# Altium PCB PCB1.PcbDoc
Units mm, origin at the board's own origin, x right, y up, seen from the top; angles counter-clockwise.
Board outline 80 x 70 mm, 2 copper layers (Top Layer, Bottom Layer); 102 components, 101 nets, 202 pads, 0 vias.
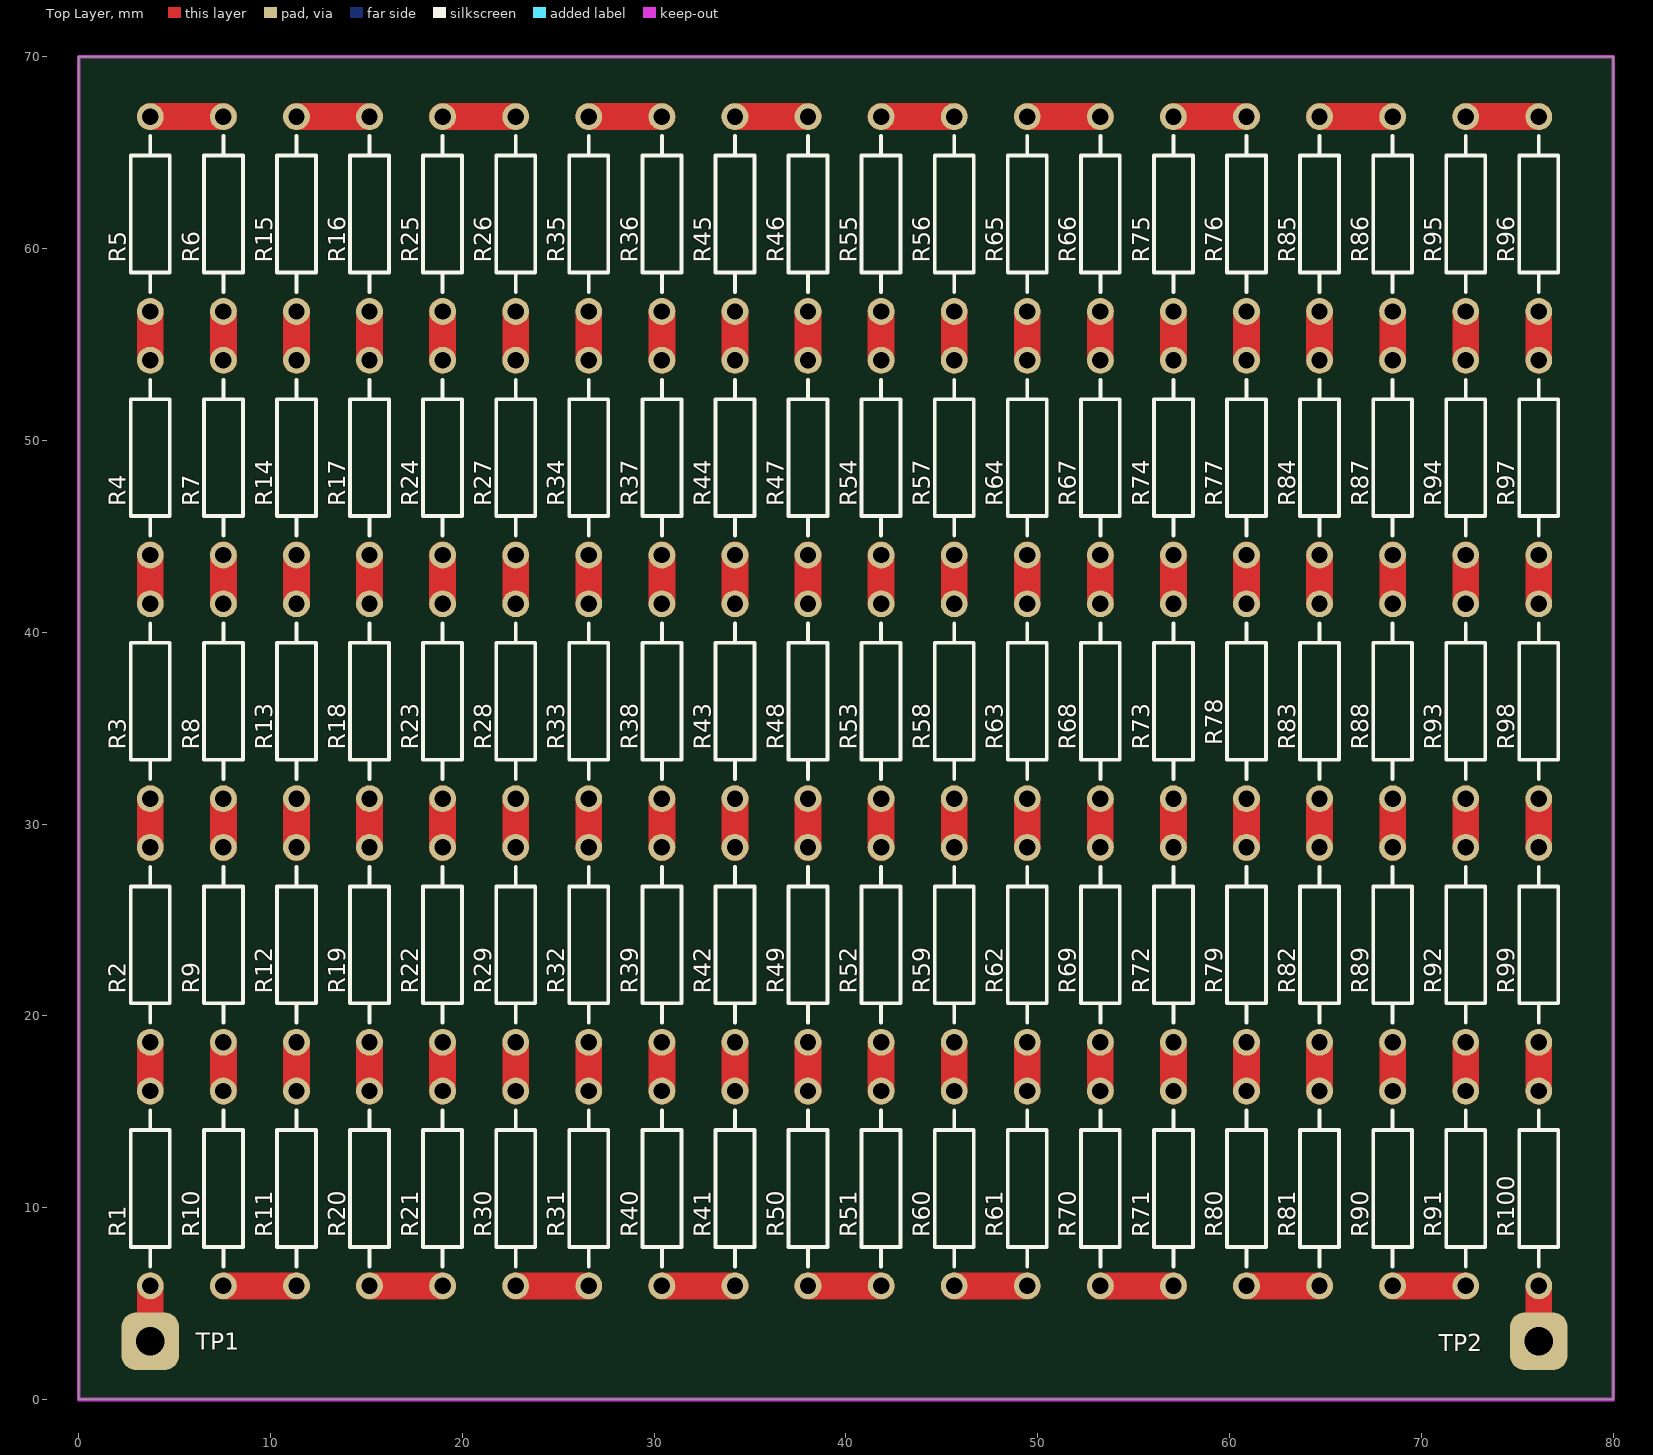
[diagram p0: Top Layer view]
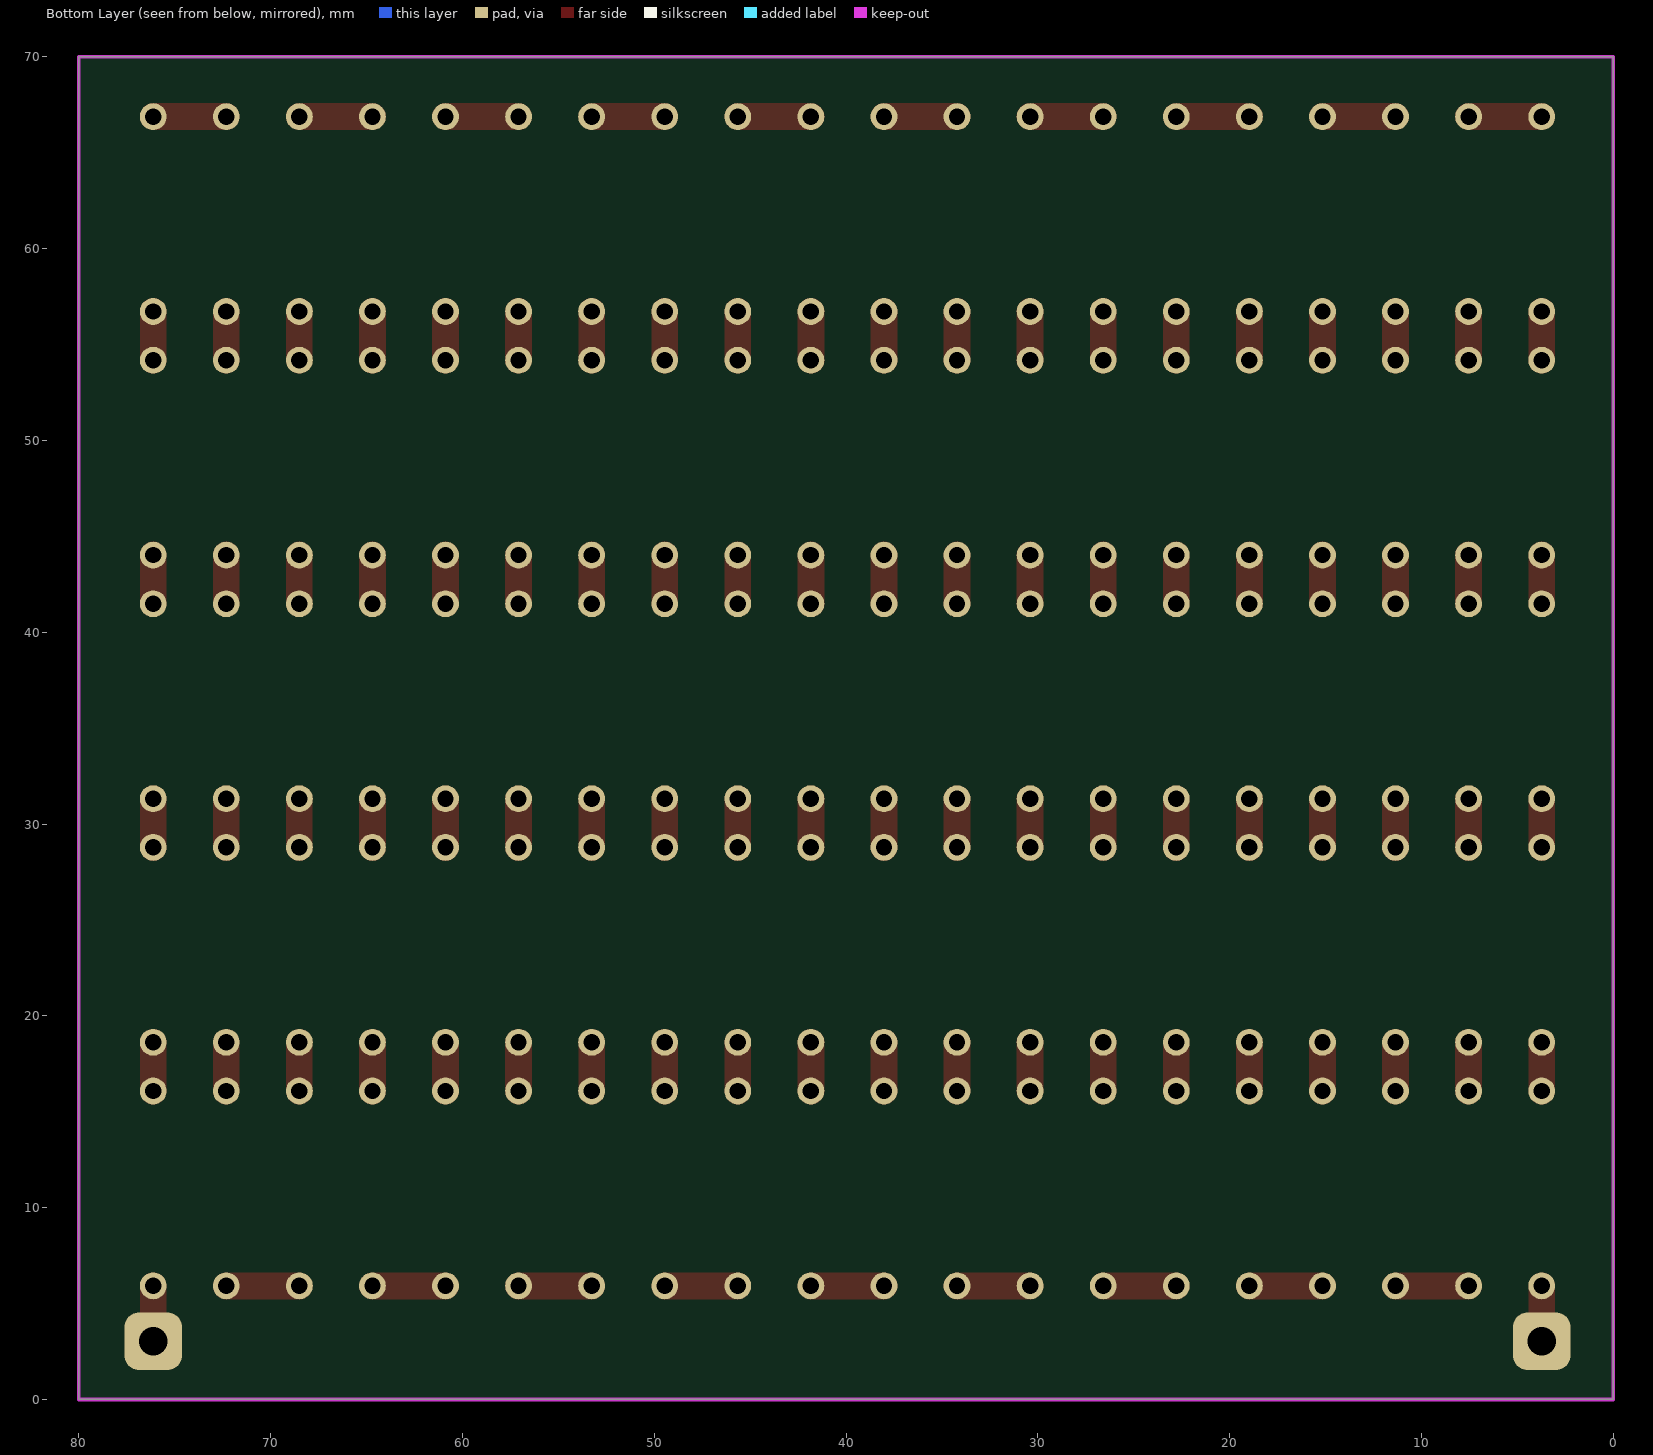
[diagram p1: Bottom Layer view, seen from below]

## Layer stack, top to bottom
Top Layer: signal copper 0.0356
Dielectric: dielectric 0.32, FR-4, Dk 4.8
Bottom Layer: signal copper 0.0356

## Board outline
0,0 80,0 80,70 0,70

## Design rules (kind name [scope] priority, off if disabled: settings)
Clearance [All] p1: gap=0.254
PolygonConnect [All] p1: connectstyle=Relief reliefconductorwidth=0.254 reliefentries=4 polygonreliefangle="90 Angle"
RoutingVias [All] p1: holewidth=0.711 width=1.27 viastyle="Through Hole" minholewidth=0.711 minwidth=1.27 maxholewidth=0.711 maxwidth=1.27
SilkToSilkClearance [All] p1: silktosilkclearance=0
SilkscreenOverComponentPads [All] p1: minsilkscreentomaskgap=0
SolderMaskExpansion [All] p1: expansion=0.102
Width [All] p1: maxlimit=1.397 minlimit=0.254 preferedwidth=1.397
26 further rules are at their usual default settings.

## Components (designator, comment, footprint, x,y, rotation, side; value= is the part's Value field where it differs from the comment)
R1 "49.99K" AXIAL-0.4 3.73,11 r270 top
R2 "49.99K" AXIAL-0.4 3.73,23.7 r270 top
R3 "49.99K" AXIAL-0.4 3.73,36.4 r270 top
R4 "49.99K" AXIAL-0.4 3.73,49.1 r270 top
R5 "49.99K" AXIAL-0.4 3.73,61.8 r270 top
R6 "49.99K" AXIAL-0.4 7.54,61.8 r90 top
R7 "49.99K" AXIAL-0.4 7.54,49.1 r90 top
R8 "49.99K" AXIAL-0.4 7.54,36.4 r90 top
R9 "49.99K" AXIAL-0.4 7.54,23.7 r90 top
R10 "49.99K" AXIAL-0.4 7.54,11 r90 top
R11 "49.99K" AXIAL-0.4 11.35,11 r270 top
R12 "49.99K" AXIAL-0.4 11.35,23.7 r270 top
R13 "49.99K" AXIAL-0.4 11.35,36.4 r270 top
R14 "49.99K" AXIAL-0.4 11.35,49.1 r270 top
R15 "49.99K" AXIAL-0.4 11.35,61.8 r270 top
R16 "49.99K" AXIAL-0.4 15.16,61.8 r90 top
R17 "49.99K" AXIAL-0.4 15.16,49.1 r90 top
R18 "49.99K" AXIAL-0.4 15.16,36.4 r90 top
R19 "49.99K" AXIAL-0.4 15.16,23.7 r90 top
R20 "49.99K" AXIAL-0.4 15.16,11 r90 top
R21 "49.99K" AXIAL-0.4 18.97,11 r270 top
R22 "49.99K" AXIAL-0.4 18.97,23.7 r270 top
R23 "49.99K" AXIAL-0.4 18.97,36.4 r270 top
R24 "49.99K" AXIAL-0.4 18.97,49.1 r270 top
R25 "49.99K" AXIAL-0.4 18.97,61.8 r270 top
R26 "49.99K" AXIAL-0.4 22.78,61.8 r90 top
R27 "49.99K" AXIAL-0.4 22.78,49.1 r90 top
R28 "49.99K" AXIAL-0.4 22.78,36.4 r90 top
R29 "49.99K" AXIAL-0.4 22.78,23.7 r90 top
R30 "49.99K" AXIAL-0.4 22.78,11 r90 top
R31 "49.99K" AXIAL-0.4 26.59,11 r270 top
R32 "49.99K" AXIAL-0.4 26.59,23.7 r270 top
R33 "49.99K" AXIAL-0.4 26.59,36.4 r270 top
R34 "49.99K" AXIAL-0.4 26.59,49.1 r270 top
R35 "49.99K" AXIAL-0.4 26.59,61.8 r270 top
R36 "49.99K" AXIAL-0.4 30.4,61.8 r90 top
R37 "49.99K" AXIAL-0.4 30.4,49.1 r90 top
R38 "49.99K" AXIAL-0.4 30.4,36.4 r90 top
R39 "49.99K" AXIAL-0.4 30.4,23.7 r90 top
R40 "49.99K" AXIAL-0.4 30.4,11 r90 top
R41 "49.99K" AXIAL-0.4 34.21,11 r270 top
R42 "49.99K" AXIAL-0.4 34.21,23.7 r270 top
R43 "49.99K" AXIAL-0.4 34.21,36.4 r270 top
R44 "49.99K" AXIAL-0.4 34.21,49.1 r270 top
R45 "49.99K" AXIAL-0.4 34.21,61.8 r270 top
R46 "49.99K" AXIAL-0.4 38.02,61.8 r90 top
R47 "49.99K" AXIAL-0.4 38.02,49.1 r90 top
R48 "49.99K" AXIAL-0.4 38.02,36.4 r90 top
R49 "49.99K" AXIAL-0.4 38.02,23.7 r90 top
R50 "49.99K" AXIAL-0.4 38.02,11 r90 top
R51 "49.99K" AXIAL-0.4 41.83,11 r270 top
R52 "49.99K" AXIAL-0.4 41.83,23.7 r270 top
R53 "49.99K" AXIAL-0.4 41.83,36.4 r270 top
R54 "49.99K" AXIAL-0.4 41.83,49.1 r270 top
R55 "49.99K" AXIAL-0.4 41.83,61.8 r270 top
R56 "49.99K" AXIAL-0.4 45.64,61.8 r90 top
R57 "49.99K" AXIAL-0.4 45.64,49.1 r90 top
R58 "49.99K" AXIAL-0.4 45.64,36.4 r90 top
R59 "49.99K" AXIAL-0.4 45.64,23.7 r90 top
R60 "49.99K" AXIAL-0.4 45.64,11 r90 top
R61 "49.99K" AXIAL-0.4 49.45,11 r270 top
R62 "49.99K" AXIAL-0.4 49.45,23.7 r270 top
R63 "49.99K" AXIAL-0.4 49.45,36.4 r270 top
R64 "49.99K" AXIAL-0.4 49.45,49.1 r270 top
R65 "49.99K" AXIAL-0.4 49.45,61.8 r270 top
R66 "49.99K" AXIAL-0.4 53.26,61.8 r90 top
R67 "49.99K" AXIAL-0.4 53.26,49.1 r90 top
R68 "49.99K" AXIAL-0.4 53.26,36.4 r90 top
R69 "49.99K" AXIAL-0.4 53.26,23.7 r90 top
R70 "49.99K" AXIAL-0.4 53.26,11 r90 top
R71 "49.99K" AXIAL-0.4 57.07,11 r270 top
R72 "49.99K" AXIAL-0.4 57.07,23.7 r270 top
R73 "49.99K" AXIAL-0.4 57.07,36.4 r270 top
R74 "49.99K" AXIAL-0.4 57.07,49.1 r270 top
R75 "49.99K" AXIAL-0.4 57.07,61.8 r270 top
R76 "49.99K" AXIAL-0.4 60.88,61.8 r90 top
R77 "49.99K" AXIAL-0.4 60.88,49.1 r90 top
R78 "49.99K" AXIAL-0.4 60.88,36.4 r90 top
R79 "49.99K" AXIAL-0.4 60.88,23.7 r90 top
R80 "49.99K" AXIAL-0.4 60.88,11 r90 top
R81 "49.99K" AXIAL-0.4 64.69,11 r270 top
R82 "49.99K" AXIAL-0.4 64.69,23.7 r270 top
R83 "49.99K" AXIAL-0.4 64.69,36.4 r270 top
R84 "49.99K" AXIAL-0.4 64.69,49.1 r270 top
R85 "49.99K" AXIAL-0.4 64.69,61.8 r270 top
R86 "49.99K" AXIAL-0.4 68.5,61.8 r90 top
R87 "49.99K" AXIAL-0.4 68.5,49.1 r90 top
R88 "49.99K" AXIAL-0.4 68.5,36.4 r90 top
R89 "49.99K" AXIAL-0.4 68.5,23.7 r90 top
R90 "49.99K" AXIAL-0.4 68.5,11 r90 top
R91 "49.99K" AXIAL-0.4 72.31,11 r270 top
R92 "49.99K" AXIAL-0.4 72.31,23.7 r270 top
R93 "49.99K" AXIAL-0.4 72.31,36.4 r270 top
R94 "49.99K" AXIAL-0.4 72.31,49.1 r270 top
R95 "49.99K" AXIAL-0.4 72.31,61.8 r270 top
R96 "49.99K" AXIAL-0.4 76.12,61.8 r90 top
R97 "49.99K" AXIAL-0.4 76.12,49.1 r90 top
R98 "49.99K" AXIAL-0.4 76.12,36.4 r90 top
R99 "49.99K" AXIAL-0.4 76.12,23.7 r90 top
R100 "49.99K" AXIAL-0.4 76.12,11 r90 top
TP1 "TP" TP 3.73,3.032 r0 top
TP2 "TP" TP 76.12,3.032 r0 top

## Footprints (in the part's own frame and the unit in brackets; to place one, negate y for a bottom-side part, rotate by r counter-clockwise, add the part's x,y. Pads: shape width x height; smd on the part's side, far side on the other; paste and mask are expansions set on the pad)
AXIAL-0.4 [mm] "Axial Device, Thru-Hole; 2 Leads; 0.4 in Pin Spacing"
  round 1.4 hole 0.85: 1(-5.08,0) 2(5.08,0)
  silkscreen extent -4.06,-1.02 4.06,1.02
TP [mm]
  rrect50% 3x3 hole 1.5: 1(0,0)

## Part data
R1 R2 R3 R4 R5 R6 R7 R8 R9 R10 R11 R12 R13 R14 R15 R16 R17 R18 R19 R20 R21 R22 R23 R24 R25 R26 R27 R28 R29 R30 R31 R32 R33 R34 R35 R36 R37 R38 R39 R40 R41 R42 R43 R44 R45 R46 R47 R48 R49 R50 R51 R52 R53 R54 R55 R56 R57 R58 R59 R60 R61 R62 R63 R64 R65 R66 R67 R68 R69 R70 R71 R72 R73 R74 R75 R76 R77 R78 R79 R80 R81 R82 R83 R84 R85 R86 R87 R88 R89 R90 R91 R92 R93 R94 R95 R96 R97 R98 R99 R100: library part Res2, "Resistor"

## Nets (pads, with @x,y where several pads share a name; then routed paths per layer and width w, separated by ;. In a path a pad name is that pad's centre, name@x,y a point inside that pad or via, vN(x,y) a via of type N, cw(c..) or ccw(c..) an arc to the next point about the centre after c; other vN are vias at no path point)
NetR1_1: R1.1 R2.2 | length 2.5
  Top Layer w1.397: R1.1 R2.2
NetR1_2: R1.2 TP1.1 | length 2.9
  Top Layer w1.397: TP1.1 R1.2
NetR2_1: R2.1 R3.2 | length 2.5
  Top Layer w1.397: R2.1 R3.2
NetR3_1: R3.1 R4.2 | length 2.5
  Top Layer w1.397: R3.1 R4.2
NetR4_1: R4.1 R5.2 | length 2.5
  Top Layer w1.397: R4.1 R5.2
NetR5_1: R5.1 R6.2 | length 3.8
  Top Layer w1.397: R5.1 R6.2
NetR6_1: R6.1 R7.2 | length 2.5
  Top Layer w1.397: R7.2 R6.1
NetR7_1: R7.1 R8.2 | length 2.5
  Top Layer w1.397: R8.2 R7.1
NetR8_1: R8.1 R9.2 | length 2.5
  Top Layer w1.397: R9.2 R8.1
NetR9_1: R9.1 R10.2 | length 2.5
  Top Layer w1.397: R10.2 R9.1
NetR10_1: R10.1 R11.2 | length 3.8
  Top Layer w1.397: R10.1 R11.2
NetR11_1: R11.1 R12.2 | length 2.5
  Top Layer w1.397: R11.1 R12.2
NetR12_1: R12.1 R13.2 | length 2.5
  Top Layer w1.397: R12.1 R13.2
NetR13_1: R13.1 R14.2 | length 2.5
  Top Layer w1.397: R13.1 R14.2
NetR14_1: R14.1 R15.2 | length 2.5
  Top Layer w1.397: R14.1 R15.2
NetR15_1: R15.1 R16.2 | length 3.8
  Top Layer w1.397: R15.1 R16.2
NetR16_1: R16.1 R17.2 | length 2.5
  Top Layer w1.397: R17.2 R16.1
NetR17_1: R17.1 R18.2 | length 2.5
  Top Layer w1.397: R18.2 R17.1
NetR18_1: R18.1 R19.2 | length 2.5
  Top Layer w1.397: R19.2 R18.1
NetR19_1: R19.1 R20.2 | length 2.5
  Top Layer w1.397: R20.2 R19.1
NetR20_1: R20.1 R21.2 | length 3.8
  Top Layer w1.397: R20.1 R21.2
NetR21_1: R21.1 R22.2 | length 2.5
  Top Layer w1.397: R21.1 R22.2
NetR22_1: R22.1 R23.2 | length 2.5
  Top Layer w1.397: R22.1 R23.2
NetR23_1: R23.1 R24.2 | length 2.5
  Top Layer w1.397: R23.1 R24.2
NetR24_1: R24.1 R25.2 | length 2.5
  Top Layer w1.397: R24.1 R25.2
NetR25_1: R25.1 R26.2 | length 3.8
  Top Layer w1.397: R25.1 R26.2
NetR26_1: R26.1 R27.2 | length 2.5
  Top Layer w1.397: R27.2 R26.1
NetR27_1: R27.1 R28.2 | length 2.5
  Top Layer w1.397: R28.2 R27.1
NetR28_1: R28.1 R29.2 | length 2.5
  Top Layer w1.397: R29.2 R28.1
NetR29_1: R29.1 R30.2 | length 2.5
  Top Layer w1.397: R30.2 R29.1
NetR30_1: R30.1 R31.2 | length 3.8
  Top Layer w1.397: R30.1 R31.2
NetR31_1: R31.1 R32.2 | length 2.5
  Top Layer w1.397: R31.1 R32.2
NetR32_1: R32.1 R33.2 | length 2.5
  Top Layer w1.397: R32.1 R33.2
NetR33_1: R33.1 R34.2 | length 2.5
  Top Layer w1.397: R33.1 R34.2
NetR34_1: R34.1 R35.2 | length 2.5
  Top Layer w1.397: R34.1 R35.2
NetR35_1: R35.1 R36.2 | length 3.8
  Top Layer w1.397: R35.1 R36.2
NetR36_1: R36.1 R37.2 | length 2.5
  Top Layer w1.397: R37.2 R36.1
NetR37_1: R37.1 R38.2 | length 2.5
  Top Layer w1.397: R38.2 R37.1
NetR38_1: R38.1 R39.2 | length 2.5
  Top Layer w1.397: R39.2 R38.1
NetR39_1: R39.1 R40.2 | length 2.5
  Top Layer w1.397: R40.2 R39.1
NetR40_1: R40.1 R41.2 | length 3.8
  Top Layer w1.397: R40.1 R41.2
NetR41_1: R41.1 R42.2 | length 2.5
  Top Layer w1.397: R41.1 R42.2
NetR42_1: R42.1 R43.2 | length 2.5
  Top Layer w1.397: R42.1 R43.2
NetR43_1: R43.1 R44.2 | length 2.5
  Top Layer w1.397: R43.1 R44.2
NetR44_1: R44.1 R45.2 | length 2.5
  Top Layer w1.397: R44.1 R45.2
NetR45_1: R45.1 R46.2 | length 3.8
  Top Layer w1.397: R45.1 R46.2
NetR46_1: R46.1 R47.2 | length 2.5
  Top Layer w1.397: R47.2 R46.1
NetR47_1: R47.1 R48.2 | length 2.5
  Top Layer w1.397: R48.2 R47.1
NetR48_1: R48.1 R49.2 | length 2.5
  Top Layer w1.397: R49.2 R48.1
NetR49_1: R49.1 R50.2 | length 2.5
  Top Layer w1.397: R50.2 R49.1
NetR50_1: R50.1 R51.2 | length 3.8
  Top Layer w1.397: R50.1 R51.2
NetR51_1: R51.1 R52.2 | length 2.5
  Top Layer w1.397: R51.1 R52.2
NetR52_1: R52.1 R53.2 | length 2.5
  Top Layer w1.397: R52.1 R53.2
NetR53_1: R53.1 R54.2 | length 2.5
  Top Layer w1.397: R53.1 R54.2
NetR54_1: R54.1 R55.2 | length 2.5
  Top Layer w1.397: R54.1 R55.2
NetR55_1: R55.1 R56.2 | length 3.8
  Top Layer w1.397: R55.1 R56.2
NetR56_1: R56.1 R57.2 | length 2.5
  Top Layer w1.397: R57.2 R56.1
NetR57_1: R57.1 R58.2 | length 2.5
  Top Layer w1.397: R58.2 R57.1
NetR58_1: R58.1 R59.2 | length 2.5
  Top Layer w1.397: R59.2 R58.1
NetR59_1: R59.1 R60.2 | length 2.5
  Top Layer w1.397: R60.2 R59.1
NetR60_1: R60.1 R61.2 | length 3.8
  Top Layer w1.397: R60.1 R61.2
NetR61_1: R61.1 R62.2 | length 2.5
  Top Layer w1.397: R61.1 R62.2
NetR62_1: R62.1 R63.2 | length 2.5
  Top Layer w1.397: R62.1 R63.2
NetR63_1: R63.1 R64.2 | length 2.5
  Top Layer w1.397: R63.1 R64.2
NetR64_1: R64.1 R65.2 | length 2.5
  Top Layer w1.397: R64.1 R65.2
NetR65_1: R65.1 R66.2 | length 3.8
  Top Layer w1.397: R65.1 R66.2
NetR66_1: R66.1 R67.2 | length 2.5
  Top Layer w1.397: R67.2 R66.1
NetR67_1: R67.1 R68.2 | length 2.5
  Top Layer w1.397: R68.2 R67.1
NetR68_1: R68.1 R69.2 | length 2.5
  Top Layer w1.397: R69.2 R68.1
NetR69_1: R69.1 R70.2 | length 2.5
  Top Layer w1.397: R70.2 R69.1
NetR70_1: R70.1 R71.2 | length 3.8
  Top Layer w1.397: R70.1 R71.2
NetR71_1: R71.1 R72.2 | length 2.5
  Top Layer w1.397: R71.1 R72.2
NetR72_1: R72.1 R73.2 | length 2.5
  Top Layer w1.397: R72.1 R73.2
NetR73_1: R73.1 R74.2 | length 2.5
  Top Layer w1.397: R73.1 R74.2
NetR74_1: R74.1 R75.2 | length 2.5
  Top Layer w1.397: R74.1 R75.2
NetR75_1: R75.1 R76.2 | length 3.8
  Top Layer w1.397: R75.1 R76.2
NetR76_1: R76.1 R77.2 | length 2.5
  Top Layer w1.397: R77.2 R76.1
NetR77_1: R77.1 R78.2 | length 2.5
  Top Layer w1.397: R78.2 R77.1
NetR78_1: R78.1 R79.2 | length 2.5
  Top Layer w1.397: R79.2 R78.1
NetR79_1: R79.1 R80.2 | length 2.5
  Top Layer w1.397: R80.2 R79.1
NetR80_1: R80.1 R81.2 | length 3.8
  Top Layer w1.397: R80.1 R81.2
NetR81_1: R81.1 R82.2 | length 2.5
  Top Layer w1.397: R81.1 R82.2
NetR82_1: R82.1 R83.2 | length 2.5
  Top Layer w1.397: R82.1 R83.2
NetR83_1: R83.1 R84.2 | length 2.5
  Top Layer w1.397: R83.1 R84.2
NetR84_1: R84.1 R85.2 | length 2.5
  Top Layer w1.397: R84.1 R85.2
NetR85_1: R85.1 R86.2 | length 3.8
  Top Layer w1.397: R85.1 R86.2
NetR86_1: R86.1 R87.2 | length 2.5
  Top Layer w1.397: R87.2 R86.1
NetR87_1: R87.1 R88.2 | length 2.5
  Top Layer w1.397: R88.2 R87.1
NetR88_1: R88.1 R89.2 | length 2.5
  Top Layer w1.397: R89.2 R88.1
NetR89_1: R89.1 R90.2 | length 2.5
  Top Layer w1.397: R90.2 R89.1
NetR90_1: R90.1 R91.2 | length 3.8
  Top Layer w1.397: R90.1 R91.2
NetR91_1: R91.1 R92.2 | length 2.5
  Top Layer w1.397: R91.1 R92.2
NetR92_1: R92.1 R93.2 | length 2.5
  Top Layer w1.397: R92.1 R93.2
NetR93_1: R93.1 R94.2 | length 2.5
  Top Layer w1.397: R93.1 R94.2
NetR94_1: R94.1 R95.2 | length 2.5
  Top Layer w1.397: R94.1 R95.2
NetR95_1: R95.1 R96.2 | length 3.8
  Top Layer w1.397: R95.1 R96.2
NetR96_1: R96.1 R97.2 | length 2.5
  Top Layer w1.397: R97.2 R96.1
NetR97_1: R97.1 R98.2 | length 2.5
  Top Layer w1.397: R98.2 R97.1
NetR98_1: R98.1 R99.2 | length 2.5
  Top Layer w1.397: R99.2 R98.1
NetR99_1: R99.1 R100.2 | length 2.5
  Top Layer w1.397: R100.2 R99.1
NetR100_1: R100.1 TP2.1 | length 2.9
  Top Layer w1.397: TP2.1 R100.1

## Keep-outs
Keep-Out Layer:
  the board outline again, w0.2